# Altium PCB PCB3.PcbDoc
Units mil, origin at the board's own origin, x right, y up, seen from the top; angles counter-clockwise.
Board outline 4505 x 2970 mil, 2 copper layers (Top Layer, Bottom Layer); 8 components, 8 nets, 82 pads, 0 vias.
Unrouted connection lines stored in the file: 4.
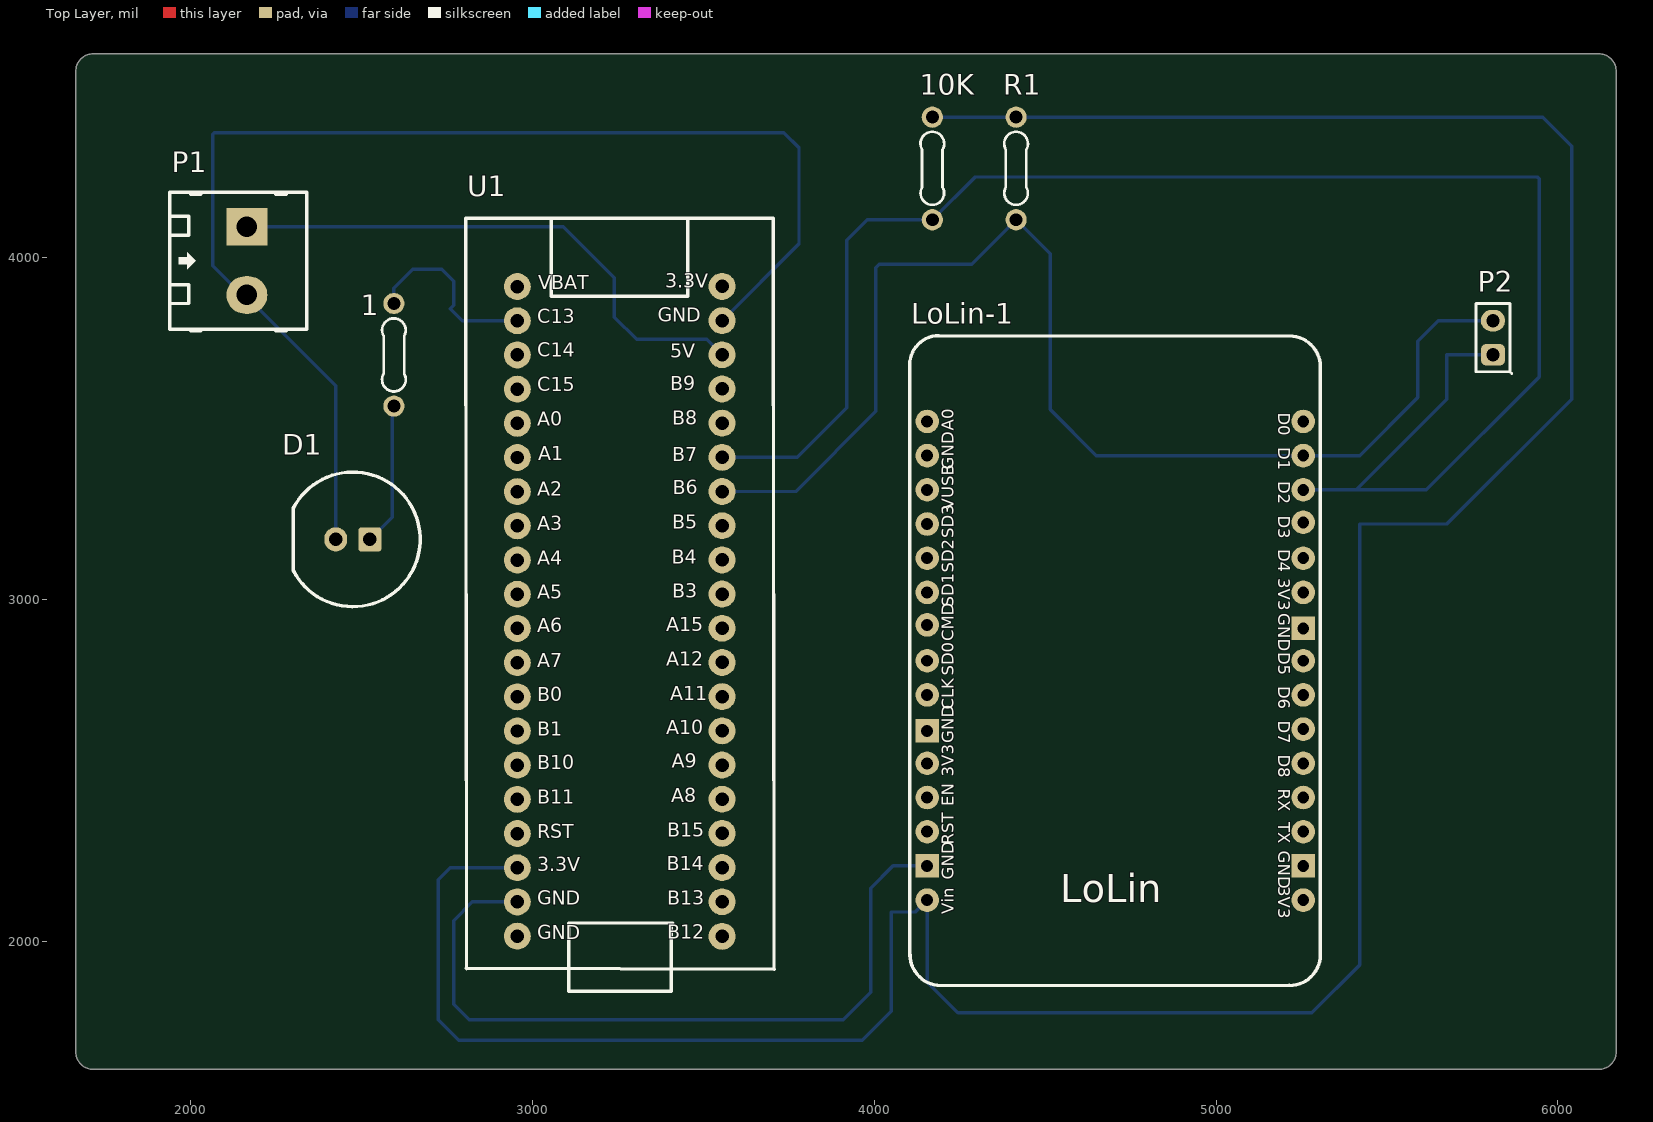
[diagram p0: Top Layer view]
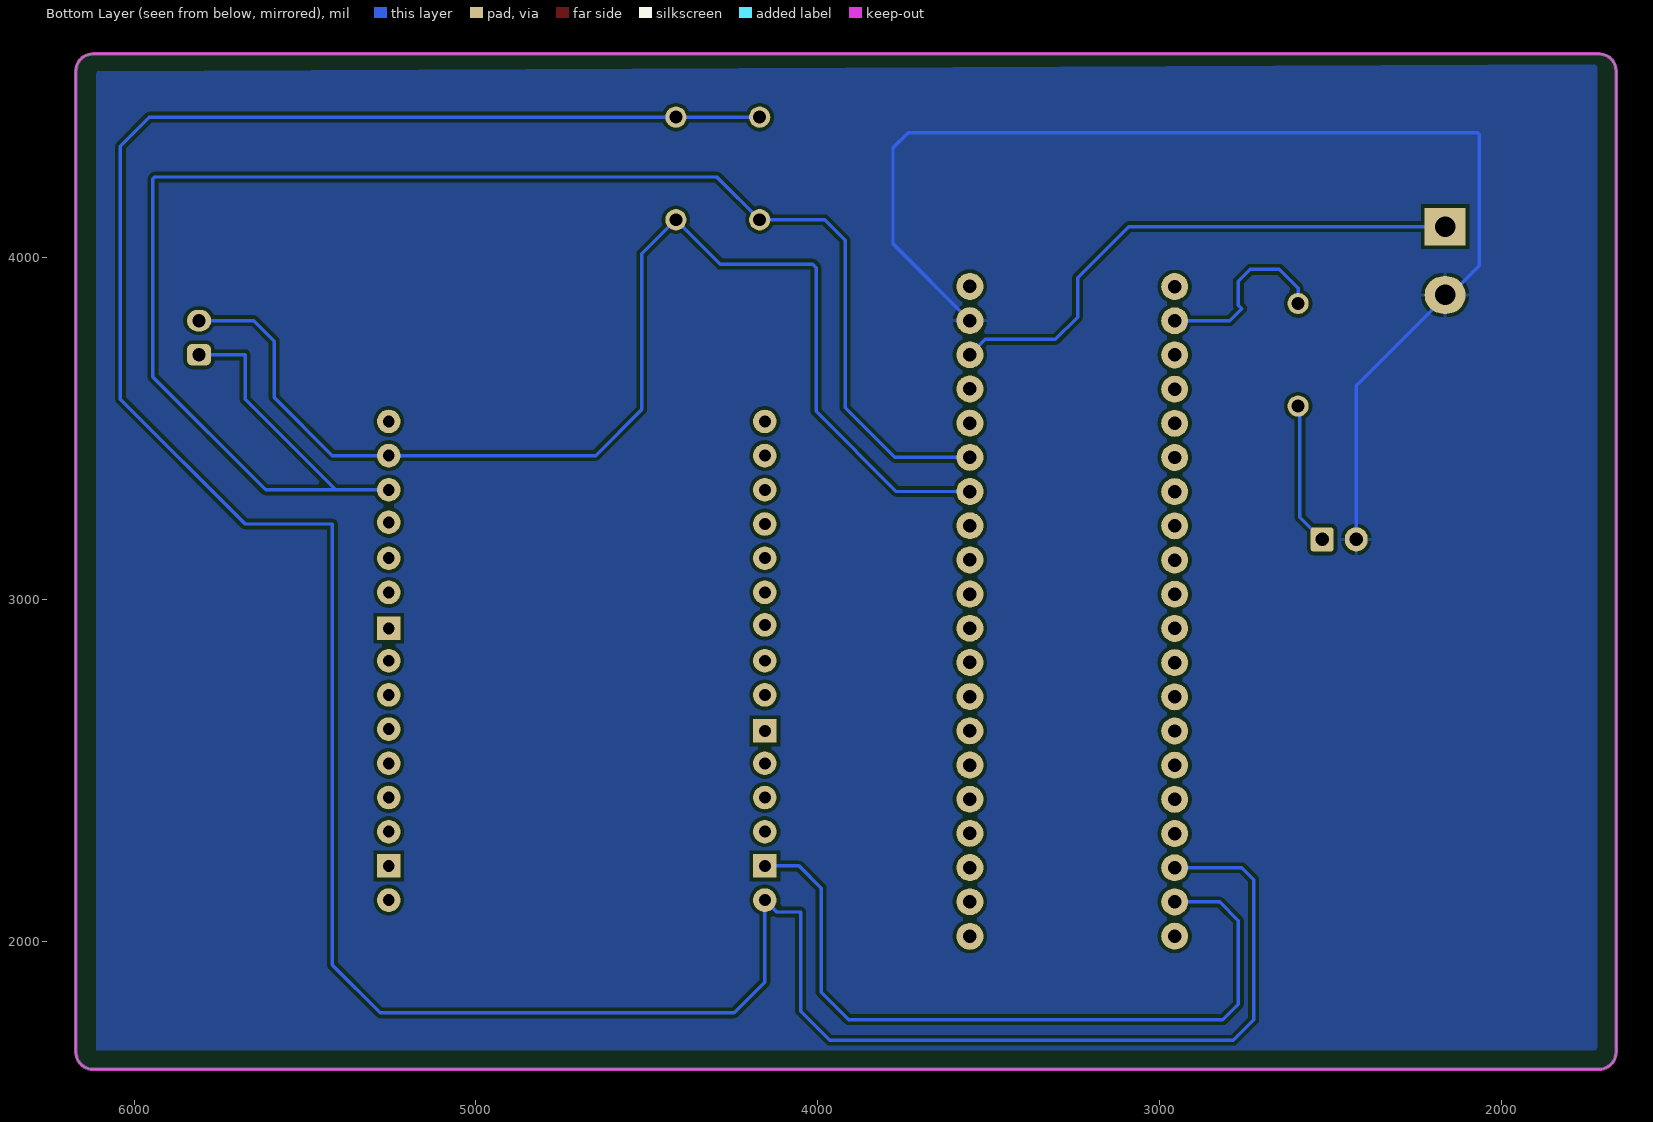
[diagram p1: Bottom Layer view, seen from below]
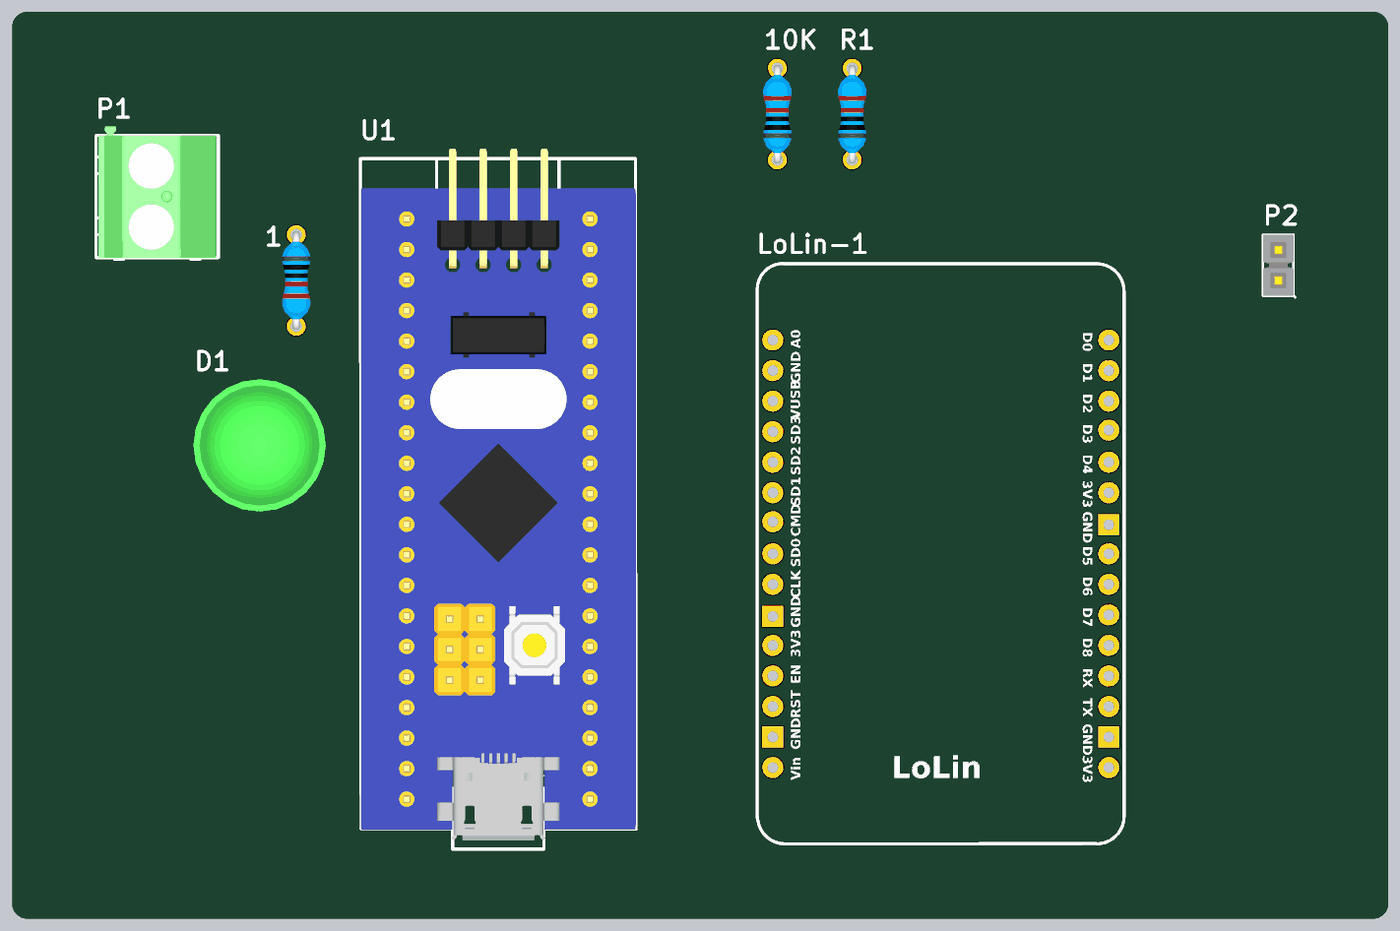
[diagram p2: 3D render of the assembled board from above, using the file's embedded part models]

## Layer stack, top to bottom
Top Solder: solder mask 0.4, Solder Resist, Dk 3.5
Top Layer: signal copper 1.4
Dielectric 1: dielectric 12.6, FR-4, Dk 4.8
Bottom Layer: signal copper 1.4
Bottom Solder: solder mask 0.4, Solder Resist, Dk 3.5

## Board outline
1665,1675 ccw(c1715,1675) 1715,1625 6120,1625 ccw(c6120,1675) 6170,1675 6170,4545 ccw(c6120,4545) 6120,4595 1715,4595 ccw(c1715,4545) 1665,4545

## Design rules (kind name [scope] priority, off if disabled: settings)
Clearance [All] p1: gap=10 ignorepadtopadclearanceinfootprint=FALSE
PolygonConnect [All] p1: connectstyle=Relief reliefconductorwidth=10 reliefentries=4 polygonreliefangle="90 Angle" airgapwidth=10
RoutingVias [All] p1: holewidth=28 width=50 viastyle="Through Hole" minholewidth=28 minwidth=50 maxholewidth=28 maxwidth=50
SolderMaskExpansion [All] p1: expansion=4 istentingtop=FALSE
SupplyNets "Schematic Supply Nets" [InNet('GND')] p1: voltage=0.000
Width [All] p1: maxlimit=10 minlimit=10 preferedwidth=10
30 further rules are at their usual default settings.

## Components (designator, comment, footprint, x,y, rotation, side; value= is the part's Value field where it differs from the comment)
1 "100" "R 1/4W/300" 2595,3865 r270 top
10K "R" "R 1/4W/300" 4170,4110 r90 top
D1 "LED GREEN" "LED 10MM - GREEN" 2475,3175 r180 top
LoLin-1 "NodeMCU V1.0 ESP-12E_1" "LoLin NodeMcu V3" 4204,3766 r0 top
P1 "Header 2" HDR/Terminal/2 2165,3990 r270 top
P2 "Header 2" HDR/Header/2 5810,3765 r90 top
R1 "10K" "R 1/4W/300" 4415,4110 r90 top
U1 "STM32F103C8T6" "Stm32 BluePill" 3246.8,3191.5 r0 top

## Footprints (in the part's own frame and the unit in brackets; to place one, negate y for a bottom-side part, rotate by r counter-clockwise, add the part's x,y. Pads: shape width x height; smd on the part's side, far side on the other; paste and mask are expansions set on the pad)
HDR/Header/2 [mm]
  rrect50% 1.6x1.8 hole 1: 1(-1.27,0)
  oval 1.6x1.8 hole 1: 2(1.27,0)
  silkscreen extent -2.67,-1.4 2.54,1.27, body extent -2.54,-1.27 2.54,1.27, height 8.89
HDR/Terminal/2 [mil] "Header 2, 2 pin, hight 400mil, Pin to Pin 200mil, Colour Green"
  rect 110x120 hole 60: 1(-100,0)
  oval 110x120 hole 60: 2(100,0)
  silkscreen extent -200,-225 205,175, body extent -229,-218 200,168, height 559
"LED 10MM - GREEN" [mm]
  rrect25% 1.7x1.8 hole 1: 1(-1.27,0)
  oval 1.7x1.8 hole 1: 2(1.27,0)
  silkscreen extent -5,-5 4.44,5, body extent -5.5,-5.5 5.5,5.5, height 14.15
"LoLin NodeMcu V3" [mil]
  round 69 hole 35: 3V3(-49,-1246) 3V3(1051,-1646) 3V3(1051,-746) A0(-49,-246) CLK(-49,-1046) CMD(-49,-841) D0(1051,-246) D1(1051,-346) D2(1051,-446) D3(1051,-541) D4(1051,-646) D5(1051,-946) D6(1051,-1046) D7(1051,-1146) D8(1051,-1246) EN(-49,-1346) GND(-49,-346) RST(-49,-1446) RX(1051,-1346) SD0(-49,-946) SD1(-49,-746) SD2(-49,-646) SD3(-49,-546) TX(1051,-1446) VIN(-49,-1646) VUSB(-49,-446)
  rect 69x69 hole 35: GND(-49,-1546) GND(-49,-1151) GND(1051,-1546) GND(1051,-851)
  silkscreen extent -100,-1896 1101,5
"R 1/4W/300" [mil] "Through hole resitor, axial 300mils, 1/4W"
  round 62 hole 38: 1(0,0) 2(300,0)
  silkscreen extent 44,-35 257,35, body extent -12,-47 312,47, height 97
"Stm32 BluePill" [mm]
  round 2 hole 1: 1(7.828,-29.909) 2(7.828,-27.343) 3(7.828,-24.803) 4(7.828,-22.263) 5(7.828,-19.723) 6(7.828,-17.183) 7(7.828,-14.643) 8(7.828,-12.103) 9(7.828,-9.563) 10(7.828,-7.023) 11(7.828,-4.483) 12(7.828,-1.943) 13(7.828,0.597) 14(7.828,3.137) 15(7.828,5.677) 16(7.828,8.217) 17(7.828,10.757) 18(7.828,13.297) 19(7.828,15.837) 20(7.828,18.377) 21(-7.386,18.366) 22(-7.386,15.826) 23(-7.386,13.286) 24(-7.386,10.746) 25(-7.386,8.206) 26(-7.386,5.666) 27(-7.386,3.126) 28(-7.386,0.586) 29(-7.386,-1.954) 30(-7.386,-4.494) 31(-7.386,-7.034) 32(-7.386,-9.574) 33(-7.386,-12.114) 34(-7.386,-14.654) 35(-7.386,-17.194) 36(-7.386,-19.734) 37(-7.386,-22.274) 38(-7.386,-24.814) 39(-7.386,-27.354) 40(-7.386,-29.894)
  silkscreen extent -11.22,-34 11.69,23.43, body extent -11.18,-33.27 11.68,24.29, height 12.31

## Part data
1 10K R1: library part Resistor, "Resistor"
D1: "Typical LED 3-pin 2-color"
LoLin-1: "LoLin NodeMCU V3"
P1 P2: "Header, 2-Pin"
U1: library part BluePill, "Designed By @Alixahedi"

## Nets (pads, with @x,y where several pads share a name; then routed paths per layer and width w, separated by ;. In a path a pad name is that pad's centre, name@x,y a point inside that pad or via, vN(x,y) a via of type N, cw(c..) or ccw(c..) an arc to the next point about the centre after c; other vN are vias at no path point)
GND: D1.2 P1.2 U1.19 | length 3676.8
  Bottom Layer w10: D1.2 2425,3625 2165,3885 P1.2 2150,3890 2065,3975 2065,4360 2070,4365 3735,4365 3780,4320 3780,4040 U1.19
Net1_1: 1.1 U1.22 | length 552.1
  Bottom Layer w10: 1.1 2595,3910 2650,3965 2735,3965 2770,3930 2770,3860 2760,3850 2795.43,3814.57 U1.22
Net1_2: 1.2 D1.1 | length 419
  Bottom Layer w10: D1.1 2590,3240 2590,3560 1.2
Net10K_1: 10K.1 LoLin-1.D2 P2.1 U1.15 | length 5065.2
  Bottom Layer w10: U1.15 3775,3415 3920,3560 3920,4050 3980,4110 10K.1 4295,4235 5940,4235 5945,4230 5945,3650 5615,3320 5410,3320 ; LoLin-1.D2 5410,3320 ; P2.1 5675,3715 5675,3585 5410,3320
Net10K_2: 10K.2 LoLin-1.VIN R1.2 U1.38 | length 8756.5
  Bottom Layer w10: U1.38 2759.57,2214.57 2725,2180 2725,1770 2785,1710 3965,1710 4050,1795 4050,2085 4120,2085 LoLin-1.VIN 4155,1880 4245,1790 5280,1790 5420,1930 5420,3220 5675,3220 6040,3585 6040,4325 5955,4410 R1.2 10K.2
NetLoLin-1_D1: LoLin-1.D1 P2.2 R1.1 U1.14 | length 3642.9
  Bottom Layer w10: U1.14 3770,3315 4005,3550 4005,3970 4015,3980 4285,3980 R1.1 4515,4010 4515,3555 4650,3420 LoLin-1.D1 5420,3420 5590,3590 5590,3755 5650,3815 P2.2
NetLoLin-1_GND: LoLin-1.GND U1.39 | length 2222.3
  Bottom Layer w10: U1.39 2824.57,2114.57 2770,2060 2770,1815 2815,1770 3910,1770 3990,1850 3990,2155 4055,2220 LoLin-1.GND@4155,2220
NetP1_1: P1.1 U1.18 | length 1612.7
  Bottom Layer w10: P1.1 3090,4090 3240,3940 3240,3825 3305,3760 3510,3760 U1.18
pads on no net: LoLin-1.3V3 LoLin-1.A0 LoLin-1.CLK LoLin-1.CMD LoLin-1.D0 LoLin-1.D3 LoLin-1.D4 LoLin-1.D5 LoLin-1.D6 LoLin-1.D7 LoLin-1.D8 LoLin-1.EN LoLin-1.RST LoLin-1.RX LoLin-1.SD0 LoLin-1.SD1 LoLin-1.SD2 LoLin-1.SD3 LoLin-1.TX LoLin-1.VUSB U1.1 U1.2 U1.3 U1.4 U1.5 U1.6 U1.7 U1.8 U1.9 U1.10 U1.11 U1.12 U1.13 U1.16 U1.17 U1.20 U1.21 U1.23 U1.24 U1.25 U1.26 U1.27 U1.28 U1.29 U1.30 U1.31 U1.32 U1.33 U1.34 U1.35 U1.36 U1.37 U1.40

## Polygon pours and split planes (outlines as drawn)
GND on Bottom Layer "GND_L02_P002" (solid, pour order 2): 1720,4565 1720,1690 1715,1685 1720,1680 6110,1680 6110,4535 6120,4545

## Keep-outs
Bottom Layer:
  lines w10: 1665,1675 ccw(c1715,1675) 1715,1625 6120,1625 ccw(c6120,1675) 6170,1675 6170,4545 ccw(c6120,4545) 6120,4595 1770,4595 1715,4595 ccw(c1715,4545) 1665,4545 1665,1675

## Text inside footprints (layer, text, board x,y; h text height)
LoLin-1: Top Overlay "LoLin" at 4544,2086 h140; Top Overlay "CLK" at 4245,2676 h60 r90; Top Overlay "SD0" at 4245,2776.43 h60 r90; Top Overlay "SD1" at 4245,2977.29 h60 r90; Top Overlay "SD2" at 4245,3077.71 h60 r90; Top Overlay "SD3" at 4245,3178.14 h60 r90; Top Overlay "VUSB" at 4244,3261 h60 r90; Top Overlay "GND" at 4245,3379 h60 r90; Top Overlay "A0" at 4245,3493 h60 r90; Top Overlay "D5" at 5170,2845 h60 r270; Top Overlay "GND" at 5170,2959 h60 r270; Top Overlay "3V3" at 5170,3060.99 h60 r270; Top Overlay "D4" at 5170,3146 h60 r270; Top Overlay "D3" at 5170,3244.42 h60 r270; Top Overlay "D2" at 5170,3344.42 h60 r270; Top Overlay "D1" at 5170,3444.65 h60 r270; Top Overlay "D0" at 5170,3546 h60 r270; Top Overlay "CMD" at 4245,2876.86 h60 r90; Top Overlay "D6" at 5170,2745.88 h60 r270; Top Overlay "3V3" at 5170,2160 h60 r270; Top Overlay "GND" at 5170,2263.8 h60 r270; Top Overlay "TX" at 5170,2347 h60 r270; Top Overlay "RX" at 5170,2445.94 h60 r270; Top Overlay "D8" at 5170,2544.89 h60 r270; Top Overlay "D7" at 5170,2644.77 h60 r270; Top Overlay "Vin" at 4245,2079 h60 r90; Top Overlay "GND" at 4245,2179 h60 r90; Top Overlay "RST" at 4245,2282 h60 r90; Top Overlay "EN" at 4245,2394 h60 r90; Top Overlay "3V3" at 4245,2481 h60 r90; Top Overlay "GND" at 4245,2578 h60 r90
U1: Top Overlay "5V" at 3404,3691.28 h70; Top Overlay "B9" at 3404,3596.28 h70; Top Overlay "B8" at 3409,3496.28 h70; Top Overlay "3.3V" at 3389,3896.28 h70; Top Overlay "GND" at 3366.8,3797.28 h70; Top Overlay "A5" at 3014,2986.28 h70; Top Overlay "A2" at 3014,3287.5 h70; Top Overlay "A3" at 3014,3187.28 h70; Top Overlay "A4" at 3014,3085.5 h70; Top Overlay "RST" at 3014,2286.28 h70; Top Overlay "B10" at 3014,2488.28 h70; Top Overlay "B11" at 3014,2386.5 h70; Top Overlay "A6" at 3014,2888.28 h70; Top Overlay "A7" at 3014,2786.5 h70; Top Overlay "B0" at 3014,2686.28 h70; Top Overlay "B1" at 3014,2585.5 h70; Top Overlay "3.3V" at 3014,2189.28 h70; Top Overlay "B15" at 3394.4,2290.28 h70; Top Overlay "A8" at 3406.5,2391.28 h70; Top Overlay "A11" at 3403.2,2689.5 h70; Top Overlay "B3" at 3409,2990.28 h70; Top Overlay "A9" at 3407.7,2492.28 h70; Top Overlay "A15" at 3391.9,2892.28 h70; Top Overlay "A12" at 3391.9,2790.5 h70; Top Overlay "A10" at 3391.9,2590.28 h70; Top Overlay "VBAT" at 3016.86,3891.5 h70; Top Overlay "B5" at 3409,3191.28 h70; Top Overlay "B14" at 3393.2,2192.5 h70; Top Overlay "B7" at 3409,3389.5 h70; Top Overlay "B4" at 3407.7,3089.5 h70; Top Overlay "B6" at 3410.2,3292.28 h70; Top Overlay "C15" at 3014,3593.28 h70; Top Overlay "C13" at 3014,3792.28 h70; Top Overlay "C14" at 3014,3694.28 h70; Top Overlay "A0" at 3014,3492.28 h70; Top Overlay "A1" at 3016.8,3391.5 h70; Top Overlay "GND" at 3014,2091.28 h70; Top Overlay "B13" at 3394,2091.28 h70; Top Overlay "GND" at 3014,1990.28 h70; Top Overlay "B12" at 3394.4,1992.5 h70